# Altium PCB oldx_fc.PcbDoc (part 2 of 2)
Units mil, origin at the board's own origin, x right, y up, seen from the top; angles counter-clockwise.
Board outline 3255.08 x 2310.05 mil, 4 copper layers (Top Layer, Mid-Layer 1, Mid-Layer 2, Bottom Layer); 154 components, 132 nets, 622 pads, 230 vias.
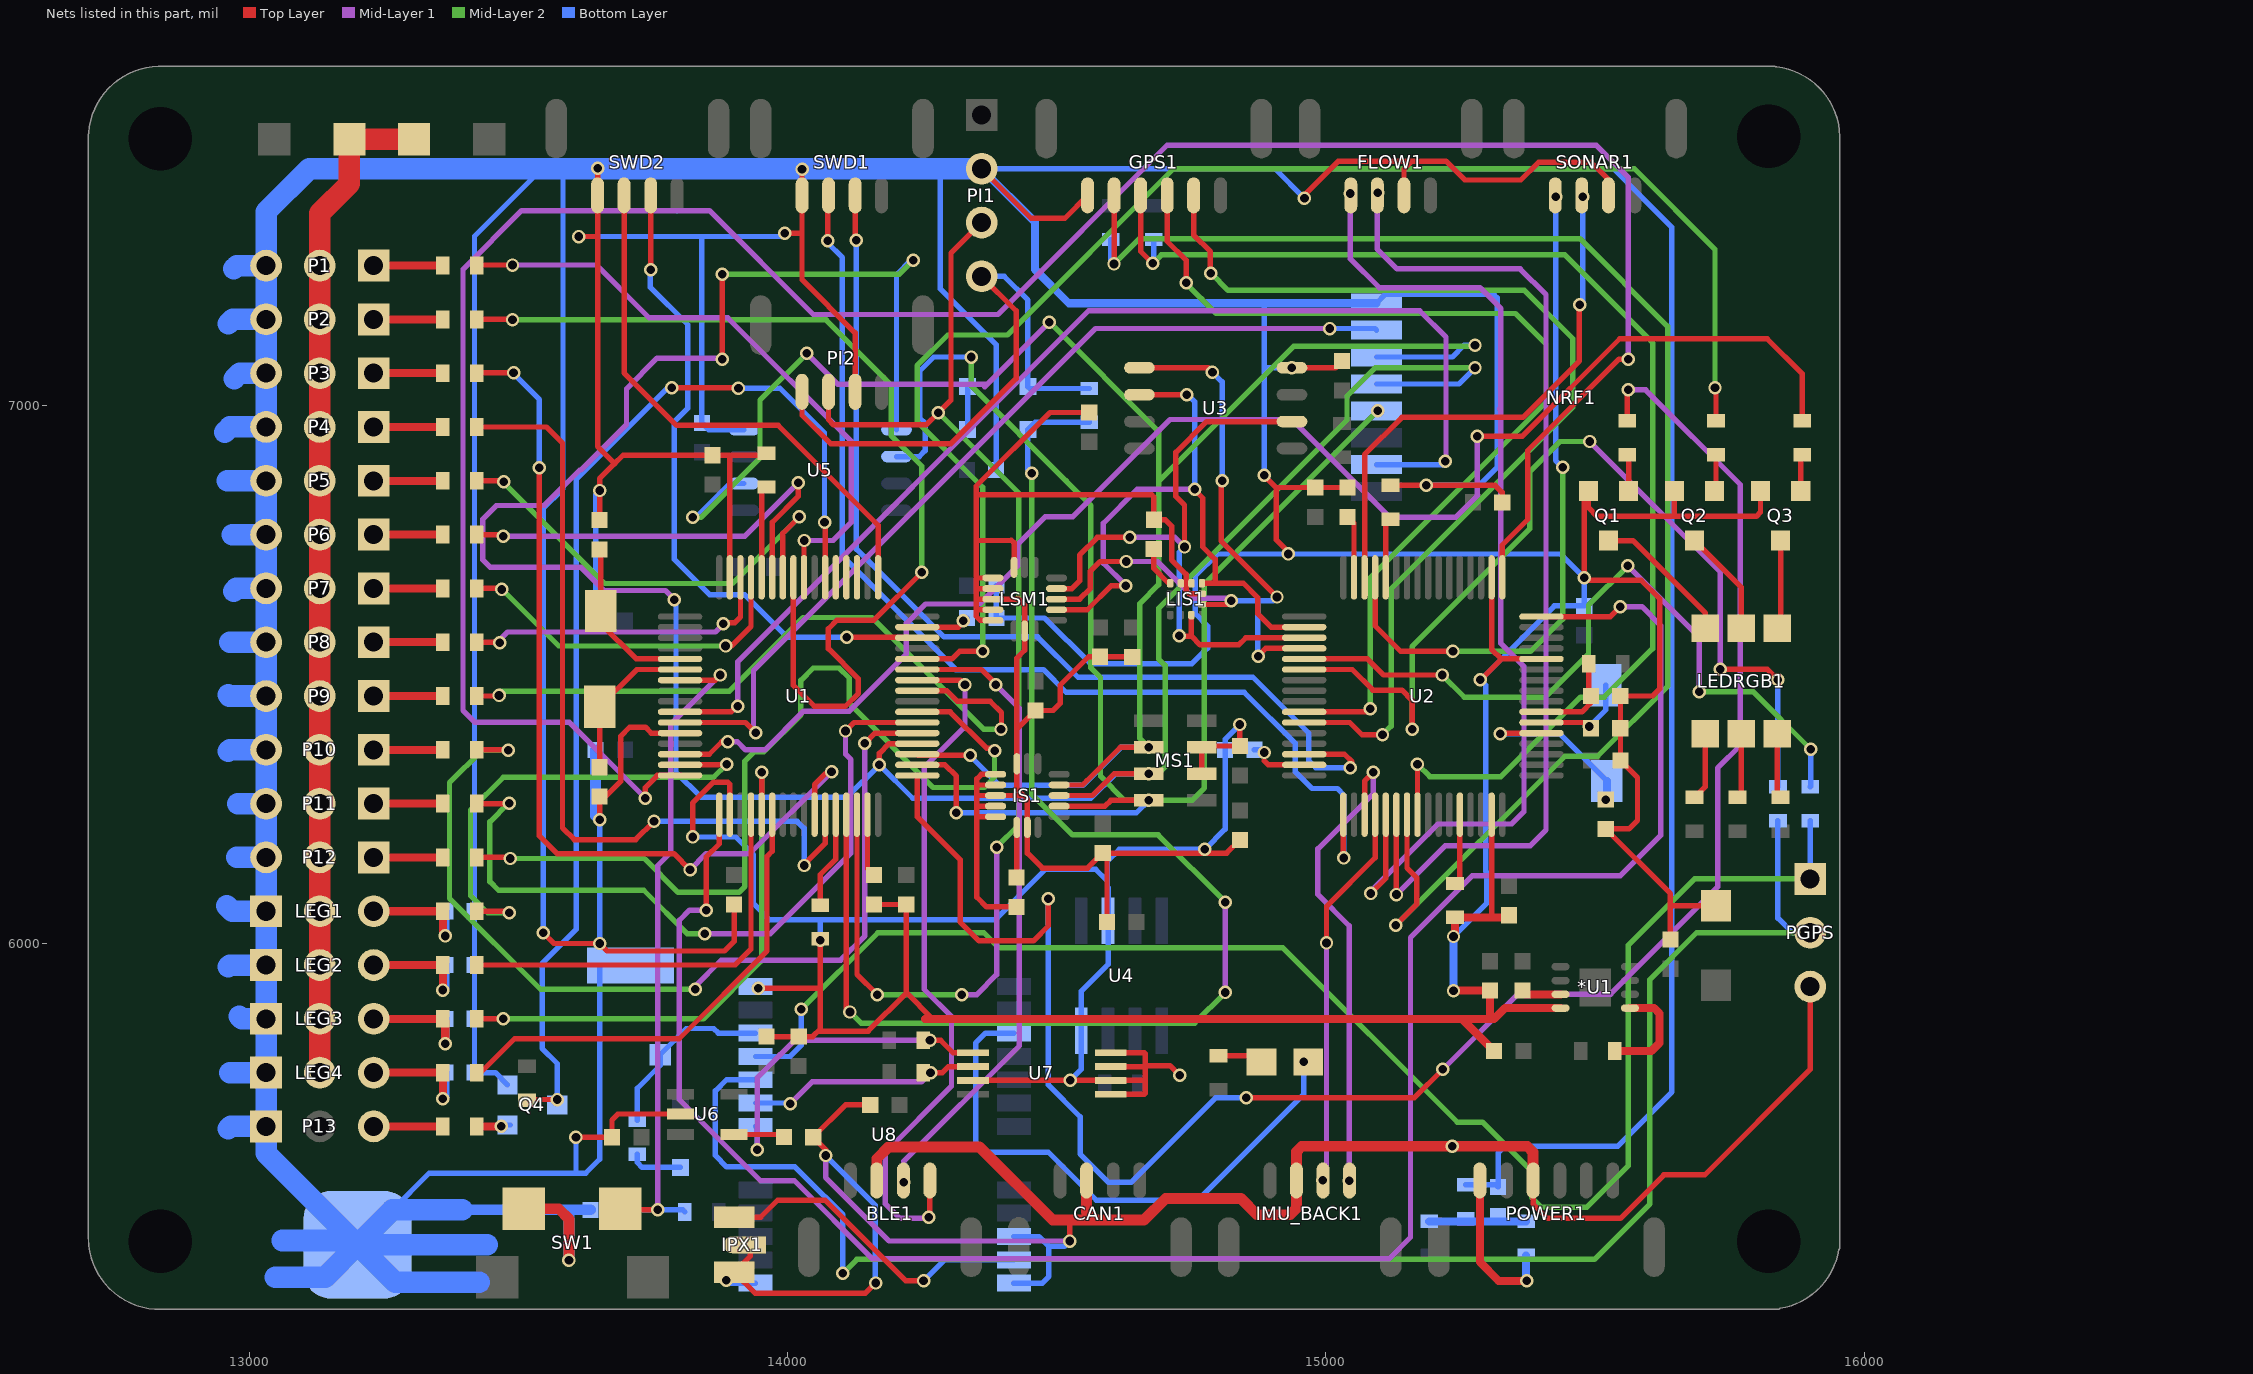
[diagram p4: the nets of this part, all layers, seen from the top]

## Via types
v1: diameter 25, hole 16, Top Layer to Bottom Layer, 221 vias
v2: diameter 50, hole 25, Top Layer to Bottom Layer, 7 vias
v3: diameter 50, hole 28, Top Layer to Bottom Layer, 2 vias

## Nets (pads, with @x,y where several pads share a name; then routed paths per layer and width w, separated by ;. In a path a pad name is that pad's centre, name@x,y a point inside that pad or via, vN(x,y) a via of type N, cw(c..) or ccw(c..) an arc to the next point about the centre after c; other vN are vias at no path point) (continued)
GND: *U1.8 BAT2.2 BLE1.3 C1.2 C2.2 C3.2 C4.2 C5.1 C6.1 C7.1 C8.1 C9.1 C10.1 C11.2 C12.2 C13.2 C15.2 C16.2 C17.2 C18.2 C19.1 C20.2 C21.2 C22.2 C23.2 C24.2 C25.2 C26.2 C27.2 C28.2 C29.2 C30.1 C31.1 C32.1 C33.1 C34.1 C35.2 C36.2 C37.1 C38.2 C39.2 C40.2 C41.2 C42.2 C43.1 C46.1 C47.1 C48.1 C49.1 C50.1 CAN1.3 D1.1 FLOW1.3 GPS1.1 IMU_BACK1.3 IPX1.1 IPX1.3 IS1.8 IS1.9 IS1.10 IS1.11 IS1.12 IS1.13 IS1.15 LEG1.1 LEG2.1 LEG3.1 LEG4.1 LIS1.2 LIS1.3 LIS1.12 LSM1.8 LSM1.9 LSM1.10 LSM1.11 LSM1.12 LSM1.13 LSM1.15 MS1.2 MS1.3 NRF1.8 P1.3 P2.3 P3.3 P4.3 P5.3 P6.3 P7.3 P8.3 P9.3 P10.3 P11.3 P12.3 P13.1 pad.0@13200,5440 PGPS.3 PI1.2 PI2.3 POWER1.4 Q1.1 Q2.1 Q3.1 Q4.1 R1.1 R2.1 R7.1 R8.1 R20.1 SONAR1.3 SW1.1 SWD1.1 SWD2.1 U1.12 U1.18 U1.63 U2.12 U2.18 U2.63 U3.4 U4.2 U4.8 U5.4 U6.2 U7.1 U7.2 U7.3 U7.4 U7.7 U8.10 U8.12 U8.13 U8.24 | length 39092.1
  Top Layer w10: v1(13545,6020) 13565,6000 v1(13650,6000) 13664,5986 13882,5986 13899.94,6003.94 C11.2@13899.94,6072.5 ; v1(13606,5640) C46.1@13673,5640 13673,5672 13684,5683 U6.2@13800,5683 ; v1(13611,7314) 13646.18,7314 ; v1(13646.18,7440.82) SWD2.1@13646.18,7390.43 13646.18,7314 ; v1(13650,6230) C7.1@13650,6273 13661,6273 13689,6301 13689,6385 13706,6402 13735,6402 13745.9,6391.1 U1.12@13799.53,6391.1 ; C8.1@13650,6787 v1(13650,6842) 13650,6864 13678,6892 ; v1(13823,6198) 13823,6261 13862,6300 13888,6300 13892.05,6295.95 U1.18@13892.05,6239.53 ; v1(13885,5373.82) IPX1.3@13900,5388.82 ; U1.63@13892.05,6680.47 13892.05,6904.05 ; IPX1.1@13930,5440 13930,5418.82 IPX1.3@13900,5388.82 ; v1(13945,5917) 14060,5917 ; R7.1@13956,6907.5 C22.2@13860.06,6907.5 13693.5,6907.5 13678,6892 ; C49.1@13960,5827 13979,5827 C48.1@14020,5827 14046,5827 14060,5841 14060,5917 ; v1(13994,7320) 14026.18,7320 ; v1(14026.18,7438.82) SWD1.1@14026.18,7390.43 14026.18,7320 ; 14060,5837 14149,5837 14219.94,5907.94 ; R1.1@14060,6008.5 v1(14060,6006) 14060,5917 ; v1(14070,5606) 14070,5617 C47.1@14047,5640 14107,5700 C50.1@14153,5700 ; PI2.3@14125,7025.43 14125,7135 14026.18,7233.82 14026.18,7320 ; C1.2@14159.94,6072.5 C26.2@14219.94,6072.5 14219.94,5908.56 14269,5859.5 ; v1(14163,5369) 14144,5350 13938.82,5350 IPX1.3@13900,5388.82 ; U7.7@14344.09,5745.59 U7.2@14600,5745.59 14659.59,5745.59 ; 14350.32,6620.31 LSM1.12@14380.94,6620.31 ; 14350.69,6659.69 LSM1.10@14380.94,6659.69 ; 14351.37,6235.63 IS1.13@14385.94,6235.63 ; 14352,6640 LSM1.11@14380.94,6640 14429,6640 14440,6629 LSM1.15@14440,6580.94 14440,6545 14425.32,6530.31 14425.32,6398.31 ; 14353,6275 IS1.11@14385.94,6275 14438,6275 ; 14353.69,6294.69 IS1.10@14385.94,6294.69 ; 14354.32,6255.31 IS1.12@14385.94,6255.31 ; 14354.37,6679.37 LSM1.9@14380.94,6679.37 ; PI1.2@14360,7440 14452,7348 14514.54,7348 GPS1.1@14556.97,7390.43 ; LSM1.13@14380.94,6600.63 14357.37,6600.63 14350,6608 14350,6749 ; IS1.9@14385.94,6314.37 14359.37,6314.37 14351,6306 14351,6086 14369,6068 C33.1@14425,6068 ; 14414,6749 14350,6749 ; 14415,6750 14420.31,6744.69 LSM1.8@14420.31,6699.06 ; v1(14524,5447) 14524,5486 ; C19.1@14560,6987 14487,6987 14350,6850 14350,6834 ; C31.1@14593,6040 C37.1@14593,6160 ; U7.1@14600,5720 14662,5720 14664,5722 14664,5773 ; U7.3@14600,5771.18 14662.18,5771.18 14664,5773 ; U7.4@14600,5796.77 14662.23,5796.77 14664,5795 14664,5773 ; C39.2@14639.94,6532.5 14639.44,6533 C34.1@14580,6533 14559,6533 14506,6480 14506,6446 14493,6433 C32.1@14460,6433 14425.32,6398.31 ; v1(14728,5755) 14710,5773 14664,5773 ; LIS1.3@14730.16,6669.53 14740,6669.53 ; LIS1.2@14749.84,6669.53 14740,6669.53 ; MS1.2@14769.21,6315.39 MS1.3@14769.21,6364.61 14771.61,6367 C30.1@14840,6367 v1(14840,6407) ; LIS1.12@14769.53,6649.84 14745.16,6649.84 14740,6655 14740,6669.53 ; C29.2@14839.94,6192.5 14815.44,6168 C37.1@14585,6168 14557,6140 14473,6140 14445,6168 IS1.15@14445,6215.94 14445,6268 14438,6275 ; v1(14885,6870) 14907.5,6847.5 ; v1@14930,6728 14907.5,6750.5 14907.5,6847.5 ; v1(14936.73,7070) 15017.56,7070 C16.2@15030.06,7082.5 ; v1@14960,7391 15023,7454 15160,7454 ; C3.2@15040.06,6847.5 C24.2@14980.06,6847.5 14907.5,6847.5 ; R2.1@15120,6851.5 v1(15186,6851.5) 15314.5,6851.5 15327.5,6838.5 C23.2@15327.5,6819.94 ; FLOW1.3@15145,7390.43 15145,7439 15160,7454 ; v1(15287,6490) 15325.9,6528.9 ; U2.63@15307.95,6239.53 15307.95,6049.55 15309,6048.5 ; U2.18@15307.95,6680.47 15307.95,6546.84 15325.9,6528.9 ; POWER1.4@15385,5559.57 15385,5516 15412,5489 15547,5489 15628,5570 15704,5570 15900,5766 PGPS.3@15900,5920 ; U2.12@15400.47,6528.9 15325.9,6528.9 ; Q1.1@15479.94,6833.6 v1(15479.94,6679.94) 15484.87,6675 15586,6675 15620,6641 15620,6473 15607,6460 C6.1@15547,6460 15547.5,6459.5 C25.2@15547.5,6339.94 15579,6308.44 15579,6229 15563,6213 C10.1@15520,6213 15640.06,6092.94 15640.06,6069 ; Q1.1@15487.6,6841.26 15487.6,6810.4 15504,6794 15643,6794 ; SONAR1.3@15525,7390.43 15525,7420 15493,7452 15395,7452 15362,7419 15258,7419 15223,7454 15160,7454 ; C13.2@15640.06,6007.5 15640.06,6069 ; Q2.1@15647.6,6841.26 15647.6,6798.6 15643,6794 ; D1.1@15725,6070 15641.06,6070 15640.06,6069 ; Q3.1@15807.6,6841.26 15807.6,6801.6 15800,6794 15643,6794 ; 13646.18,7314 13646.18,6923.82 13678,6892 ; 14350,6749 14350,6834 ; 14350,6834 14676,6834 14680.06,6829.94 C38.2@14680.06,6787.5 14701.5,6787.5 14713,6776 14713,6713 14740,6686 14740,6669.53 ; 14425.32,6398.31 IS1.8@14425.32,6334.06 14425.32,6287.69 14438,6275
  Top Layer w15: 14254.5,5859.5 14269,5859.5 15253.06,5859.5 ; v1(15237,5912.5) C15.2@15304.94,5912.5 15304.94,5859.5 ; v1(15237,6013) 15238,6013 15240,6015 R8.1@15240,6048.5 15309,6048.5 C27.2@15335.94,6048.5 ; C12.2@15312.5,5800.06 15253.06,5859.5 ; *U1.8@15436,5880.02 15333.02,5880.02 15312.5,5859.5 15304.94,5859.5 ; 15253.06,5859.5 15304.94,5859.5
  Top Layer w20: SW1.1@13509,5507 13574,5507 13593,5488 v1(13593,5411) ; BLE1.3@14165,5559.57 14165,5600 14187,5622 14356,5622 14492,5486 14524,5486 14570,5486 ; CAN1.3@14555,5559.57 14555,5501 14570,5486 ; POWER1.4@15385,5559.57 15385,5612 15374,5623 v1(15235,5623) 14955,5623 14945,5613 IMU_BACK1.3@14945,5559.57 14945,5508 14933,5496 14872,5496 14842,5526 14702,5526 14662,5486 14570,5486
  Mid-Layer 1 w10: v1(14070,5606) 14070,5566 14070,5565 14188,5447 v1(14524,5447)
  Bottom Layer w10: pad.0@13265,5505 13333,5573 13624,5573 13650,5599 BAT2.2@13650,5958.74 ; Q4.1@13478.74,5737.4 13456.08,5760.06 C41.2@13417.5,5760.06 C40.2@13417.5,5860.06 C36.2@13417.5,5960.06 C35.2@13417.5,6060.06 13417.5,7314.5 13543,7440 ; v1(13545,6020) 13545,6808 13582,6845 13582,7430 ; 13606,5575 v1(13606,5640) ; v1(13611,7314) 13839,7314 ; C21.2@13642.5,6599.94 13642.5,6834.5 v1(13650,6842) ; v1(13650,6000) v1(13650,6230) ; v1(13823,6198) 13903,6198 13936,6165 13936,6074 13966,6044 14385,6044 14479,6138 14572,6138 14594,6116 ; v1(13885,5373.82) 13890,5368.82 U8.13@13939.68,5368.82 ; U5.4@13918.27,6955 13852.44,6955 C42.2@13839.94,6967.5 13839.94,7313.06 13839,7314 ; U8.24@13939.68,5920 13942,5920 v1(13945,5917) ; v1@13988,7314 13839,7314 ; v1(14060,6006) 14060,6040 ; v1(14070,5606) 14162,5514 14162,5370 v1(14163,5369) ; 14290,7440 14283,7433 14283,7217 14387,7113 C43.1@14387,6880 ; PI1.2@14360,7440 14905,7440 ; C17.2@14387.5,6665.06 C2.2@14387.5,6605.06 14476.94,6605.06 14562,6520 14751,6520 14780,6549 14780,6590 14757,6613 14757,6683 14798,6724 v1(14930,6724) 15435.87,6724 v1(15479.94,6679.94) C18.2@15479.94,6627.5 15424.5,6627.5 v1(15287,6490) 15297,6480 15297,6134 15299,6132 15299,6075 v1(15237,6013) ; U8.12@14420,5368.82 14472.82,5368.82 14485,5381 14485,5437 ; U8.10@14420,5455.43 14466.57,5455.43 14485,5437 ; v1(14524,5447) 14514,5437 14485,5437 ; v1(14525,5746) 14545,5766 U4.8@14545,5837.64 14545,5911 14595,5961 U4.2@14595,6042.36 14595,6104 14594,6105 14594,6116 ; v1(14840,6407) 14812.5,6379.5 C4.2@14812.5,6359.94 14812.5,6212.5 v1(14775,6175) 14616,6175 14594,6153 14594,6116 ; v1(14885,6870) 14885,7183 ; 14887,7070 v1(14936.73,7070) ; v1(14960,7385) 14905,7440 ; NRF1.8@15094,7190 15111,7207 15311,7207 15318,7200 15318,6885 15284.5,6851.5 v1(15186,6851.5) ; v1(15235,5623) 15332,5623 ; R20.1@15260,5551.5 15315.94,5551.5 C28.2@15319.94,5547.5 15319.94,5610.94 15332,5623 ; 14905,7440 15534,7440 15643,7331 15643,5724 15542,5623 15332,5623
  Bottom Layer w15: PI1.2@14360,7440 14459,7341 14459,7253 14522,7190 NRF1.8@15094,7190 ; v1(15237,5912.5) v1(15237,6013)
  Bottom Layer w20: 13395,5505 C5.1@13633,5505 ; v1(13593,5411) 13593,5501 ; v1@13642.5,6237.5 C20.2@13642.5,6359.94
  Bottom Layer w40: 12953,6950 12963,6960 P4.3@13030,6960 ; 12957,6070 12967,6060 LEG1.1@13030,6060 ; 12958,6860 P5.3@13030,6860 ; 12960,5656 12964,5660 P13.1@13030,5660 ; 12960,5957 12963,5960 LEG2.1@13030,5960 ; 12960,6357 12963,6360 P10.3@13030,6360 ; 12960,6462 12962,6460 P9.3@13030,6460 ; 12960,7152 12968,7160 P2.3@13030,7160 ; 12963,5760 LEG4.1@13030,5760 ; 12963,6560 P8.3@13030,6560 ; 12967,6760 P6.3@13030,6760 ; 12970,6655 12975,6660 P7.3@13030,6660 ; 12970,7254 12976,7260 P1.3@13030,7260 ; 12971,7050 12981,7060 P3.3@13030,7060 ; 12976,6160 P12.3@13030,6160 ; 12977,6260 P11.3@13030,6260 ; 12980,5865 12985,5860 LEG3.1@13030,5860 ; 13047,5380 13140,5380 pad.0@13200,5440 ; 13060,5448 pad.0@13192,5448 ; 13395,5505 13265,5505 pad.0@13200,5440 ; 13426,5370 13270,5370 pad.0@13200,5440 ; 13441,5440 pad.0@13200,5440 ; PI1.2@14360,7440 14290,7440 13543,7440 13110,7440 13030,7360 P1.3@13030,7260 ; P13.1@13030,5660 13030,5610 pad.0@13192,5448 ; P13.1@13030,5660 LEG4.1@13030,5760 ; LEG4.1@13030,5760 LEG3.1@13030,5860 ; LEG3.1@13030,5860 LEG2.1@13030,5960 ; LEG2.1@13030,5960 LEG1.1@13030,6060 ; LEG1.1@13030,6060 P12.3@13030,6160 ; P12.3@13030,6160 P11.3@13030,6260 ; P11.3@13030,6260 P10.3@13030,6360 ; P10.3@13030,6360 P9.3@13030,6460 ; P9.3@13030,6460 P8.3@13030,6560 ; P8.3@13030,6560 P7.3@13030,6660 ; P7.3@13030,6660 P6.3@13030,6760 ; P6.3@13030,6760 P5.3@13030,6860 ; P5.3@13030,6860 P4.3@13030,6960 ; P4.3@13030,6960 P3.3@13030,7060 ; P3.3@13030,7060 P2.3@13030,7160 ; P2.3@13030,7160 P1.3@13030,7260 ; pad.0@13192,5448 pad.0@13200,5440
GROUND1: R32.2 U1.15 | length 902.7
  Top Layer w10: R32.2@13421.5,6060 13479,6060 v1(13482,6057) ; U1.15@13799.53,6332.05 v1@13885.05,6332.05
  Mid-Layer 2 w10: v1(13482,6057) 13442,6057 13410,6089 13410,6248 13471,6309 13862,6309 v1(13886,6333)
GROUND2: R33.2 U1.20 | length 772.2
  Top Layer w10: R33.2@13421.5,5960 13902,5960 13931.42,5989.42 U1.20@13931.42,6239.53
GROUND3: R36.2 U1.21 | length 1153.9
  Top Layer w10: R36.2@13421.5,5860 v1(13471,5860) ; U1.21@13951.1,6239.53 v1@13951.1,6306.1
  Mid-Layer 2 w10: v1(13471,5860) 13843,5860 13951.1,5968.1 13951.1,6212 ; 13951.1,6037.1 13951.1,6212 ; v1@13951.1,6306.1 13951.1,6212
  other v1: 13951,6318
GROUND4: R37.2 U1.22 | length 890.7
  Top Layer w10: R37.2@13421.5,5760 13429,5760 13492,5823 13798,5823 13961,5986 13961,6162 13970.79,6171.79 U1.22@13970.79,6239.53
IIC_SCLG: R49.1 U7.6 U8.19 | length 460.7
  Top Layer w10: v1(14265,5760) R49.1@14251.5,5760 14287,5760 14298.18,5771.18 U7.6@14344.09,5771.18
  Mid-Layer 1 w10: v1(14004,5702) 14045,5743 14248,5743 v1(14265,5760)
  Bottom Layer w10: U8.19@13939.68,5703.46 14002.54,5703.46 v1(14004,5702)
IIC_SDAG: R48.1 U7.5 U8.18 | length 642.8
  Top Layer w10: v1(14264,5820) R48.1@14251.5,5820 14284,5820 14307.23,5796.77 U7.5@14344.09,5796.77
  Mid-Layer 1 w10: v1(13943,5617) 13943,5751 13985,5793 14012,5820 v1(14264,5820)
  Bottom Layer w10: U8.18@13939.68,5660.16 13943,5656.84 v1(13943,5617)
LED_11: R24.1 U1.14 | length 2793.8
  Top Layer w10: U1.14@13799.53,6351.73 13853.73,6351.73 v1@13877,6375 ; v1(15281,6943) 15365,6943 15546,7124 15820,7124 15885,7059 R24.1@15885,6971.5
  Mid-Layer 1 w10: v1(13888,6375) 13906,6375 13921,6360 13957,6360 14029,6432 14114,6432 14220,6538 14220,6595 14256,6631 14356,6631 14427,6702 14427,6742 14478,6793 14529,6793 14710,6974 14937,6974 15119,6792 15241,6792 15281,6832 v1(15281,6943)
LED_12: R23.1 U1.44 | length 2722.1
  Top Layer w10: U1.44@14240.47,6528.9 14304.9,6528.9 14319,6543 v1(14362,6543) ; R23.1@15725,6971.5 v1@15725,7031
  Mid-Layer 2 w10: v1(14362,6543) 14362,6848 14240,6970 14240,7074 14297,7131 14408,7131 14717,7440 15573,7440 15723,7290 v1(15723,7033)
LED_13: R22.1 U1.33 | length 3580
  Top Layer w10: U1.33@14240.47,6312.36 14240.47,6235.53 14320,6156 14320,6040 14355,6005 14456,6005 14484,6033 v1(14484,6083) ; v1(14852,5713) 15164,5713 v1(15217,5766) ; R22.1@15560,6971.5 v1@15560,7027
  Mid-Layer 1 w10: v1(15217,5766) 15357,5906 15529,5906 15728,6105 15728,6326 15770,6368 15770,6853 15594,7029 v1(15562,7029)
  Bottom Layer w10: v1(14484,6083) 14484,5737 14543,5678 14543,5609 14596,5556 14638,5556 14795,5713 v1(14852,5713)
Net*U1_1: *U1.1 R10.2 | length 203.9
  Top Layer w15: R10.2@15536.5,5800 15605,5800 15620,5815 15620,5870 15610,5880 *U1.1@15565,5880
Net*U1_7: *U1.7 C14.2 | length 73.9
  Top Layer w15: C14.2@15364.94,5912.5 15371.84,5905.59 *U1.7@15436,5905.59
NetBAT2_1: BAT2.1 R47.1 U8.22 | length 340.3
  Bottom Layer w10: R47.1@13720,5671.5 13720,5731 13762.68,5773.68 BAT2.1@13762.68,5793.39 13811.29,5842 13862,5842 13870.61,5833.39 U8.22@13939.68,5833.39
NetC1_1: C1.1 U1.31 | length 117.5
  Top Layer w10: U1.31@14147.95,6239.53 14147.95,6139.05 C1.1@14160,6127
NetC2_1: C2.1 U1.47 | length 98.3
  Top Layer w10: U1.47@14240.47,6587.95 14316.95,6587.95 v1@14326,6597
  Bottom Layer w10: v1(14326,6600) 14331,6605 C2.1@14333,6605
NetC3_1: C3.1 U2.31 | length 117.5
  Top Layer w10: C3.1@15040,6793 15052.05,6780.95 U2.31@15052.05,6680.47
NetC4_1: C4.1 U2.47 | length 97.9
  Top Layer w10: 14885,6340 14892.95,6332.05 U2.47@14959.53,6332.05
  Bottom Layer w10: C4.1@14867,6360 14880,6360 v1(14885,6355)
NetC6_2: C6.2 R6.1 U2.7 | length 173.2
  Top Layer w10: U2.7@15400.47,6430.47 15475.47,6430.47 15492.5,6447.5 C6.2@15492.5,6460.06 15488.5,6464.06 R6.1@15488.5,6520
NetC7_2: C7.2 U1.6 X1.1 | length 290.7
  Top Layer w10: C7.2@13650.06,6327.5 13650.06,6439.94 X1.1@13650,6440 13719.21,6509.21 U1.6@13799.53,6509.21
NetC8_2: C8.2 U1.5 X1.2 | length 313.3
  Top Layer w10: C8.2@13649.94,6732.5 13652,6730.44 X1.2@13652,6618 13652,6595 13718.1,6528.9 U1.5@13799.53,6528.9
NetC9_2: C9.2 U2.6 X2.1 | length 195.2
  Top Layer w10: U2.6@15400.47,6410.79 15481.78,6410.79 C9.2@15492.5,6400.06
  Bottom Layer w10: v1(15489.28,6403.28) 15486,6400 15520,6434 X2.1@15520,6480
NetC10_2: C10.2 U2.5 X2.2 | length 346.7
  Top Layer w10: v1(15324,6390) 15325.1,6391.1 U2.5@15400.47,6391.1
  Bottom Layer w10: v1(15324,6390) 15434,6390 X2.2@15522,6302
  Bottom Layer w15: v1(15520.06,6267.5) 15522,6269.44 X2.2@15522,6302
NetC28_1: C28.1 R17.1 R19.2 R20.2 | length 180
  Bottom Layer w15: R19.2@15192,5483.5 15252,5483.5 R17.1@15372,5483.5
NetC33_2: C33.2 IS1.14 | length 93.5
  Top Layer w10: C33.2@14425.06,6122.5 14425.06,6215.69 IS1.14@14425.32,6215.94
NetC35_1: C35.1 LEG1.3 R32.1 | length 222.4
  Top Layer w15: LEG1.3@13230,6060 R32.1@13358.5,6060 13358.5,6018.5 v1(13363,6014)
  Bottom Layer w15: v1(13363,6014) C35.1@13363,6060
NetC36_1: C36.1 LEG2.3 R33.1 | length 217
  Top Layer w15: LEG2.3@13230,5960 R33.1@13358.5,5960 v1(13358.5,5913.5)
  Bottom Layer w15: v1@13363,5918 C36.1@13363,5960
NetC38_1: C38.1 LIS1.4 | length 77.9
  Top Layer w10: C38.1@14680,6733 14680,6697 14707.47,6669.53 LIS1.4@14710.47,6669.53
NetC40_1: C40.1 LEG3.3 R36.1 | length 222.4
  Top Layer w15: LEG3.3@13230,5860 R36.1@13358.5,5860 13363,5855.5 v1(13363,5814)
  Bottom Layer w15: v1(13363,5814) C40.1@13363,5860
NetC41_1: C41.1 LEG4.3 R37.1 | length 221
  Top Layer w15: LEG4.3@13230,5760 R37.1@13358.5,5760 v1(13358.5,5711.5)
  Bottom Layer w15: v1@13363,5716 C41.1@13363,5760
NetC47_2: C47.2 U6.4 | length 94.5
  Top Layer w10: U6.4@13900,5645 13987.56,5645 C47.2@13992.5,5640.06
NetD2_2: D2.2 D3.1 | length 80
  Bottom Layer w10: D2.2@14334,6955 D3.1@14334,7035
NetD3_2: D3.2 PI1.4 PI2.1 R41.1 | length 1105.7
  Top Layer w10: PI2.1@14026.18,7025.43 14026.18,6981.82 14079,6929 14303,6929 14424,7050 14424,7176 PI1.4@14360,7240
  Bottom Layer w10: PI1.4@14360,7240 14402,7240 14446,7196 D3.2@14446,7035 ; D3.2@14449.5,7031.5 R41.1@14560,7031.5
NetD7_2: D7.2 R47.2 | length 99.2
  Bottom Layer w10: R47.2@13720,5608.5 13720,5593 13729,5584 D7.2@13800,5584
NetIPX1_2: IPX1.2 U8.11 | length 611.5
  Top Layer w10: IPX1.2@13900,5491.18 13949.18,5491.18 13981,5523 14069,5523 14219,5373 v1(14252,5373)
  Bottom Layer w10: v1(14252,5373) 14291.13,5412.13 U8.11@14420,5412.13
NetLEDRGB1_1: LEDRGB1.1 R15.2 | length 126.8
  Top Layer w10: R15.2@15685,6271.5 15705,6291.5 LEDRGB1.1@15705,6390
NetLEDRGB1_2: LEDRGB1.2 R14.2 | length 121.4
  Top Layer w10: R14.2@15765,6271.5 15771.93,6278.43 LEDRGB1.2@15771.93,6390
NetLEDRGB1_3: LEDRGB1.3 R13.2 | length 121
  Top Layer w10: LEDRGB1.3@15838.86,6390 15838.86,6277.64 R13.2@15845,6271.5
NetLEDRGB1_4: LEDRGB1.4 Q3.3 | length 165.6
  Top Layer w10: LEDRGB1.4@15838.86,6585.67 15845,6591.81 Q3.3@15845,6748.74
NetLEDRGB1_5: LEDRGB1.5 Q2.3 | length 199.1
  Top Layer w10: Q2.3@15685,6748.74 15771.93,6661.81 LEDRGB1.5@15771.93,6585.67
NetLEDRGB1_6: LEDRGB1.6 Q1.3 | length 264.1
  Top Layer w10: Q1.3@15525,6748.74 15570.26,6748.74 15705,6614 LEDRGB1.6@15705,6585.67
NetP1_1: P1.1 R11.2 | length 128.5
  Top Layer w15: P1.1@13230,7260 R11.2@13358.5,7260
NetP2_1: P2.1 R12.2 | length 128.5
  Top Layer w15: P2.1@13230,7160 R12.2@13358.5,7160
NetP3_1: P3.1 R16.2 | length 128.5
  Top Layer w15: P3.1@13230,7060 R16.2@13358.5,7060
NetP4_1: P4.1 R18.2 | length 128.5
  Top Layer w15: P4.1@13230,6960 R18.2@13358.5,6960
NetP5_1: P5.1 R21.2 | length 128.5
  Top Layer w15: P5.1@13230,6860 R21.2@13358.5,6860
NetP6_1: P6.1 R25.2 | length 128.5
  Top Layer w15: P6.1@13230,6760 R25.2@13358.5,6760
NetP7_1: P7.1 R26.2 | length 128.5
  Top Layer w15: P7.1@13230,6660 R26.2@13358.5,6660
NetP8_1: P8.1 R27.2 | length 128.5
  Top Layer w15: P8.1@13230,6560 R27.2@13358.5,6560
NetP9_1: P9.1 R28.2 | length 128.5
  Top Layer w15: P9.1@13230,6460 R28.2@13358.5,6460
NetP10_1: P10.1 R30.2 | length 128.5
  Top Layer w15: P10.1@13230,6360 R30.2@13358.5,6360
NetP11_1: P11.1 R31.2 | length 128.5
  Top Layer w15: P11.1@13230,6260 R31.2@13358.5,6260
NetP12_1: P12.1 R34.2 | length 128.5
  Top Layer w15: P12.1@13230,6160 R34.2@13358.5,6160
NetP13_3: P13.3 R40.2 | length 128.5
  Top Layer w15: P13.3@13230,5660 R40.2@13358.5,5660
NetPGPS_1: PGPS.1 R45.1 U8.21 | length 2936.1
  Mid-Layer 2 w10: v1(14025,5878) 14167,6020 14364,6020 14392,5992 14920,5992 15244,5668 15291,5668 15382,5577 15382,5528 15400,5510 15485,5510 15562,5587 15562,5997 15685,6120 PGPS.1@15900,6120
  Bottom Layer w10: U8.21@13939.68,5790.08 14004.08,5790.08 14025,5811 v1(14025,5878) ; PGPS.1@15900,6120 R45.1@15900,6228.5
NetPGPS_2: PGPS.2 R46.1 U8.20 | length 3163.3
  Mid-Layer 2 w10: v1(14102,5387) 14128,5413 15499,5413 15602,5516 15602,5933 15689,6020 PGPS.2@15900,6020
  Bottom Layer w10: U8.20@13939.68,5746.77 13885.77,5746.77 13865,5726 13865,5606 13886,5585 14013,5585 14033,5565 ; 14041,5557 14033,5565 ; v1(14102,5387) 14102,5496 14033,5565 ; R46.1@15840,6228.5 15840,6047 15867,6020 PGPS.2@15900,6020
NetPPS1_1: PPS1.1 R44.2 | length 88.5
  Top Layer w10: R44.2@14800,5791.5 PPS1.1@14888.47,5791.5
NetQ1_2: Q1.2 R22.2 | length 68.2
  Top Layer w10: R22.2@15560,6908.5 15562.4,6906.1 Q1.2@15562.4,6841.26
NetQ2_2: Q2.2 R23.2 | length 68.3
  Top Layer w10: Q2.2@15722.4,6841.26 15725,6843.86 R23.2@15725,6908.5
NetQ3_2: Q3.2 R24.2 | length 68.3
  Top Layer w10: Q3.2@15882.4,6841.26 15882.4,6905.9 R24.2@15885,6908.5
NetQ4_2: Q4.2 R40.1 | length 50.4
  Top Layer w15: R40.1@13421.5,5660 v1(13467,5660)
  Bottom Layer w10: Q4.2@13478.74,5662.6 Q4.2@13483.6,5662.6
NetR1_2: R1.2 U1.28 | length 180
  Top Layer w10: R1.2@14060,6071.5 14060,6128 14088.9,6156.9 U1.28@14088.9,6239.53
NetR2_2: R2.2 U2.28 | length 111.7
  Top Layer w10: U2.28@15111.1,6680.47 15111.1,6779.6 R2.2@15120,6788.5
NetR7_2: R7.2 U1.60 | length 171.7
  Top Layer w10: U1.60@13951.1,6680.47 13951.1,6839.6 R7.2@13960,6848.5
NetR8_2: R8.2 U2.60 | length 131.7
  Top Layer w10: R8.2@15240,6111.5 15248.9,6120.4 U2.60@15248.9,6239.53
NRF_CE: NRF1.2 U1.10 | length 2160.7
  Top Layer w10: U1.10@13799.53,6430.47 13894.47,6430.47 v1@13905,6441
  Mid-Layer 1 w10: v1(13907,6441) 13907,6524 14559,7176 15174,7176 15223,7127 15223,7004 v1@15223,6896
  Bottom Layer w10: NRF1.2@15094,6890 15216,6890 v1(15222,6896)
NRF_IRQ: NRF1.7 U1.11 | length 1687.6
  Top Layer w10: U1.11@13799.53,6410.79 13921.21,6410.79 v1(13940,6392)
  Mid-Layer 1 w10: v1(13940,6392) 13936,6396 13936,6507 14572,7143 v1(15007,7143)
  Bottom Layer w10: v1(15007,7143) 15091,7143 NRF1.7@15094,7140
P_LEG: LEG1.2 LEG2.2 LEG3.2 LEG4.2 P1.2 P2.2 P3.2 P4.2 P5.2 P6.2 P7.2 P8.2 P9.2 P10.2 P11.2 P12.2 R38.2 R39.2 | length 1877.8
  Top Layer w40: LEG4.2@13130,5760 LEG3.2@13130,5860 LEG2.2@13130,5960 LEG1.2@13130,6060 P12.2@13130,6160 P11.2@13130,6260 P10.2@13130,6360 P9.2@13130,6460 P8.2@13130,6560 P7.2@13130,6660 P6.2@13130,6760 P5.2@13130,6860 P4.2@13130,6960 P3.2@13130,7060 P2.2@13130,7160 13130,7238 P1.2@13130,7260 13130,7357 13185,7412 R39.2@13185,7495 13241,7495 R38.2@13305,7495
POWER: POWER1.6 R17.2 | length 301
  Top Layer w15: POWER1.6@15286,5559.57 15286,5408 15321,5373 v1(15373,5373)
  Bottom Layer w15: R17.2@15372,5420.5 15372,5374 v1(15373,5373)
PPS: PPS1.2 U8.3 | length 1059
  Bottom Layer w10: U8.3@14420,5833.39 14367.39,5833.39 14349,5815 14349,5631 14368,5612 14484,5612 14573,5523 14762,5523 14959,5720 v1(14959,5780)
PWM1: R11.1 U1.56 | length 1153
  Top Layer w10: R11.1@13422.5,7261 v1(13488,7261) ; U1.56@14029.84,6680.47 14029.84,6748.84 v1(14030,6749)
  Mid-Layer 1 w10: v1(13488,7261) 13644,7261 13742,7163 13888,7163 14117.43,6933.57 14117.43,6782.43 14084,6749 v1(14030,6749)
  Mid-Layer 2 w10: v1@13487,7260 v1(13488,7261)
PWM2: R12.1 U1.57 | length 1899.4
  Top Layer w10: R12.1@13421.5,7160 v1@13487,7160 ; U1.57@14010.16,6680.47 14010.16,6479.84 14049,6441 14107,6441 14131,6465 14131,6492 14075,6548 14075,6585 14091,6601 14160,6601 v1(14249,6690)
  Mid-Layer 2 w10: v1(13488,7159) 14071,7159 14191.86,7038.14 14191.86,6944.14 14249,6887 v1(14249,6690)
PWM3: R16.1 U1.26 | length 1705.2
  Top Layer w10: R16.1@13421.5,7060 13422.5,7061 v1(13490,7061) ; v1(13538,6884) 13538,6200 13571,6167 13788,6167 v1(13818,6137) ; U1.26@14049.53,6239.53 14049.53,6295.53 v1@14070,6316
  Mid-Layer 1 w10: v1(13818,6137) 13848,6167 13880,6167 ; 13854,6167 13880,6167 ; v1(14081,6319) 13929,6167 13880,6167
  Bottom Layer w10: v1(13490,7061) 13490,7059 13538,7011 v1(13538,6884)
PWM4: R18.1 U1.27 | length 1545.1
  Top Layer w10: R18.1@13421.5,6960 13551,6960 13581,6930 13581,6270 13581,6215 13603,6193 13717,6193 v1(13751,6227) ; v1(14030,6145) 14029,6146 14069.21,6186.21 U1.27@14069.21,6239.53
  Bottom Layer w10: v1(13751,6227) 13796,6227 14017,6227 14030,6214 v1(14030,6145)
PWM5: R21.1 U1.58 | length 852.9
  Top Layer w10: R21.1@13421.5,6860 v1@13470,6860 ; U1.58@13990.47,6680.47 13990.47,6762.47 v1(14021,6793)
  Mid-Layer 2 w10: v1@13471,6857 13659,6669 13897,6669 v1(14021,6793)
  other v1: 13472,6858
PWM6: R25.1 U1.59 | length 831
  Top Layer w10: R25.1@13421.5,6760 v1@13468,6760 ; U1.59@13970.79,6680.47 13970.79,6782.79 14019,6831 v1(14019,6856)
  Mid-Layer 1 w10: v1(13471,6757) 13920,6757 v1(14019,6856)
PWM7: R26.1 U1.61 | length 660.4
  Top Layer w10: R26.1@13421.5,6660 13466,6660 v1(13468,6658) ; v1(13884,6553) 13895,6553 13931.42,6589.42 U1.61@13931.42,6680.47
  Mid-Layer 2 w10: v1(13468,6658) 13469,6658 13574,6553 v1(13884,6553)
PWM8: R27.1 U1.62 | length 588.7
  Top Layer w10: R27.1@13421.5,6560 13463,6560 v1(13464,6559) ; v1(13880,6594) 13882,6596 13901,6596 13911.73,6606.73 U1.62@13911.73,6680.47
  Mid-Layer 1 w10: v1(13464,6559) 13462,6561 13462,6562 13479,6579 13865,6579 v1(13880,6594)
PWM9: R28.1 U1.41 | length 1348
  Top Layer w10: R28.1@13421.5,6460 13462,6460 v1(13463,6461) ; U1.41@14240.47,6469.84 14295.16,6469.84 14315,6450 14376,6450 14397,6429 14397,6393 14396,6394 v1(14396,6398)
  Mid-Layer 2 w10: v1(13463,6461) 13457,6461 13465,6469 13891,6469 14028,6606 14156,6606 14364,6398 v1(14396,6398)
PWM10: R30.1 U1.37 | length 1756.3
  Top Layer w10: R30.1@13421.5,6360 v1@13479,6360 ; v1(14143,6372) 14162.1,6391.1 U1.37@14240.47,6391.1
  Mid-Layer 1 w10: v1(13828,5915) 13828,5921 13876,5969 14098,5969 14143,6014 v1(14143,6372)
  Mid-Layer 2 w10: v1(13480,6359) 13431,6359 13371,6299 13371,6084 13540,5915 v1(13828,5915)
PWM11: R31.1 U1.38 | length 1364.5
  Top Layer w10: R31.1@13421.5,6260 v1@13481,6260 ; v1(14107,6395) 14122.79,6410.79 U1.38@14240.47,6410.79
  Mid-Layer 1 w10: v1(13845,6018) 13967,6018 14117,6168 14117,6342 14107,6352 v1(14107,6395)
  Mid-Layer 2 w10: v1@13481,6261 13446,6226 13446,6115 13462,6099 13732,6099 13813,6018 v1(13845,6018)
  other v1: 13482,6261
PWM12: R34.1 U1.39 | length 1693.2
  Top Layer w10: R34.1@13421.5,6160 13482,6160 v1(13484,6158) ; U1.39@14240.47,6430.47 14301.53,6430.47 14369,6363 14387,6363 14387,6361 v1(14384,6358)
  Mid-Layer 2 w10: v1(13484,6158) 13733,6158 13796,6095 13909,6095 13920,6106 13920,6339 13937.51,6356.51 13955.51,6356.51 14024,6425 14024,6489 14047,6512 14095,6512 14114,6493 14114,6446 14270,6290 14365,6290 14384,6309 v1(14384,6358)
RST_FC: C5.2 R5.1 SW1.2 U1.7 | length 1300.4
  Top Layer w10: SW1.2@13688,5507 13689.94,5505.06 v1(13758,5505.06) ; U1.7@13799.53,6489.53 13864.53,6489.53
  Mid-Layer 1 w10: v1(13758,5505.06) 13758,6145 13782,6169 13782,6407 v1(13874,6499)
  Bottom Layer w10: C5.2@13687.5,5505.06 v1(13758,5505.06) 13804.5,5505.06 R5.1@13808.5,5501.06
SBUS: Q4.3 R35.1 U1.54 | length 2074.9
  Top Layer w10: R35.1@13516.5,5710 v1(13571,5710) ; v1(13784,7033) 13907,7033 v1(13908,7032) ; v1(14068,6783) 14069.21,6781.79 U1.54@14069.21,6680.47
  Bottom Layer w10: v1@13571.26,5720 13571.26,5776.74 13543,5805 13543,5962.74 13606.26,6026 13606.26,6862.26 13781,7037 13781,7036 v1(13784,7033) ; v1(13908,7032) 13985,7032 14068,6949 v1(14068,6783)
SCL_B: GPS1.3 R4.2 U2.56 | length 2391.7
  Top Layer w10: GPS1.3@14655.39,7390.43 14655.39,7286.61 v1(14678,7264) ; U2.56@15170.16,6239.53 v1@15170.16,6332.84
  Mid-Layer 2 w10: v1(14678,7264) 14694,7280 15444,7280 15607,7117 15607,6548 15517,6458 15473,6458 15325,6310 15193,6310 v1(15170,6333)
  Bottom Layer w10: v1(14678,7264) 14680,7266 R4.2@14680,7308.5
SCLK_FC: SWD2.2 U1.49 | length 1016.3
  Top Layer w10: SWD2.2@13695.39,7390.43 13695.39,7254.39 13695.39,7060.61 13793,6963 13982,6963 14167.64,6777.36 U1.49@14167.64,6680.47
SCLK_IMU: SWD1.2 U2.49 | length 2026.9
  Top Layer w10: v1(14074,7306) 14074,7389.04 SWD1.2@14075.39,7390.43 ; U2.49@15032.36,6239.53 15032.36,6159.64 v1(15033,6159)
  Bottom Layer w10: v1(14074,7306) 14074,7302 14101,7275 14101,6720 14312,6509 14475,6509 14517,6467 14848,6467 14943,6372 14943,6319 14974,6288 15021,6288 15033,6276 v1(15033,6159)
SDA_B: GPS1.2 R3.2 U2.55 | length 2878.5
  Top Layer w10: v1@14606.18,7263.18 GPS1.2@14606.18,7390.43 ; v1(15130,6034) 15169,6073 15169,6122 15150.47,6140.53 U2.55@15150.47,6239.53
  Mid-Layer 2 w10: v1(14606,7263) 14653,7310 15472,7310 15635,7147 15635,6478 15505,6348 15444,6348 v1(15130,6034)
  Bottom Layer w10: R3.2@14600,7308.5 14600,7269 v1(14606,7263)
SPI3_CK: IS1.2 MS1.8 NRF1.4 U1.34 U5.6 | length 2948.9
  Top Layer w10: U1.34@14240.47,6332.05 14291.95,6332.05 14313,6311 v1(14313,6243) ; IS1.2@14504.06,6255.31 14589.32,6255.31 14600.18,6266.18 v1(14670.79,6266.18)
  Mid-Layer 2 w10: v1(14341,7090) 14341,7036 14517,6860 14563,6814 14563,6512 14581,6494 14581,6311 14625.82,6266.18 v1(14670.79,6266.18) 14751.18,6266.18 14774,6289 14774,6668 v1(15096,6990)
  Bottom Layer w10: U5.6@14201.73,6905 14244,6905 14255,6916 14255,6967 14245,6977 14245,7064 14271,7090 v1(14341,7090) ; v1@14310.5,6245.5 14308,6243 v1(14313,6243) 14647.61,6243 v1(14670.79,6266.18) ; NRF1.4@15094,6990 v1(15096,6990)
SPI3_CK_IMU: LIS1.1 LSM1.2 U2.34 U3.6 | length 1185.6
  Top Layer w10: LSM1.2@14499.06,6620.31 14556.32,6620.31 14601,6665 v1(14628,6665) v1@14634,6665 ; U3.6@14653.27,7020 v1(14741,7020) ; v1(14756,6844) 14756,6843 14771,6828 14771,6737 14794,6714 14794,6669.53 ; LIS1.1@14769.53,6669.53 14794,6669.53 ; U2.34@14959.53,6587.95 14898.05,6587.95 14873,6613 14873,6643 14846.47,6669.53 14794,6669.53
  Mid-Layer 1 w10: v1(14628,6665) 14586,6707 14586,6781 14649,6844 v1(14756,6844)
  Bottom Layer w10: v1(14741,7020) 14743,7020 14756,7007 v1(14756,6844)
SPI3_SI: IS1.3 MS1.7 NRF1.5 U1.36 U5.5 | length 4832.2
  Top Layer w10: v1(13878,7086) v1(13878,7244) ; v1(14170,6332) 14170,6353.42 14188,6371.42 U1.36@14240.47,6371.42 ; IS1.3@14504.06,6275 14566,6275 14606.39,6315.39 v1(14670.79,6315.39)
  Mid-Layer 1 w10: v1(13789,6639) 13772,6656 13658,6656 13615,6699 13447,6699 13433,6713 13433,6789 13458,6814 13547,6814 13613,6880 13615,6880 13700,6965 13700,7031 13757,7088 13877,7088 13878,7087 v1(13878,7086)
  Mid-Layer 2 w10: v1(13878,7244) 14207,7244 v1(14233,7270) ; v1(14670.79,6315.39) 14688.39,6315.39 14701,6328 14701,6517 14689,6529 14689,6623 15039,6973 15039,7018 15091,7070 v1(15277,7070)
  Bottom Layer w10: v1(13789,6639) 13789,6641 13792,6638 13792,6318 13838,6272 14110,6272 v1(14170,6332) 14232,6270 14563,6270 14608.39,6315.39 v1(14670.79,6315.39) ; U5.5@14201.73,6955 14201.73,7242.73 14229,7270 v1(14233,7270) ; NRF1.5@15094,7040 15247,7040 v1(15277,7070)
SPI3_SI_IMU: LIS1.11 LSM1.3 U2.36 U3.5 | length 1316
  Top Layer w10: LSM1.3@14499.06,6640 14542,6640 14562,6660 14562,6692 14580,6710 v1(14629,6710) ; U3.5@14653.27,7070 v1@14781,7070 ; LIS1.11@14769.53,6630.16 v1@14819.16,6630.16 ; v1@14805,6858 14805,6748 v1(14909,6644) ; v1@14874,6535 14887.58,6548.58 U2.36@14959.53,6548.58
  Mid-Layer 1 w10: v1(14629,6710) 14687,6710 14755,6642 14819,6642 v1(14824,6637)
  Bottom Layer w10: v1(14789,7062) 14807,7044 v1(14807,6860) ; v1(14824,6637) v1@14902,6637 ; v1@14873,6535 14873,6635
  other v1: 14874,6534
SPI3_SO: IS1.4 MS1.6 NRF1.6 U1.35 U5.2 | length 3503.9
  Top Layer w10: U1.35@14240.47,6351.73 14242.2,6350 v1(14339,6350) ; IS1.4@14504.06,6294.69 14547.69,6294.69 14555.5,6302.5 14617.61,6364.61 v1(14670.79,6364.61)
  Mid-Layer 1 w10: v1(14035,7097) 14092.5,7039.5 14370.5,7039.5 ; 14366,7035 14370.5,7039.5 ; v1(14486,7155) 14370.5,7039.5
  Mid-Layer 2 w10: v1(13823,6792) 13838,6792 13948,6902 13948,7010 v1(14035,7097) ; v1(14486,7155) 14689,6952 14689,6859 ; v1(14670.79,6364.61) 14654,6381.39 14654,6632 14689,6667 14689,6859 ; v1@15275,7110 14940,7110 14689,6859
  Bottom Layer w10: v1@13830,6793 13892,6855 U5.2@13918.27,6855 ; v1(14339,6350) 14339,6348 14393,6294 14548,6294 14618.61,6364.61 v1(14670.79,6364.61) ; v1(14486,7155) v1@14487,7155 ; NRF1.6@15094,7090 15235,7090 15257,7112 v1(15277,7112)
SPI3_SO_IMU: LIS1.9 LSM1.4 U2.35 U3.2 | length 1173.2
  Top Layer w10: LSM1.4@14499.06,6659.69 14527.69,6659.69 14542,6674 14542,6722 14575,6755 v1(14635,6755) ; v1@14727.84,6571.16 14749.84,6571.16 ; v1(14737,6737) 14737,6815 14721,6831 14721,6913 14778,6970 U3.2@14936.73,6970 ; LIS1.9@14749.84,6610.47 14749.84,6571.16 ; U2.35@14959.53,6568.27 14851,6568.27 14837.73,6555 14766,6555 14749.84,6571.16
  Mid-Layer 1 w10: v1(14635,6755) 14719,6755 v1(14737,6737)
  Bottom Layer w10: v1(14727,6572) 14727,6727
SWD_FC: SWD2.3 U1.46 | length 1228
  Top Layer w10: v1(13745,7252) SWD2.3@13745,7390.43 ; v1(14109,6569) 14221.27,6569 14222,6568.27 U1.46@14240.47,6568.27
  Bottom Layer w10: v1(13745,7252) 13744,7251 13744,7220 13814,7150 13814,6995 13789,6970 13789,6714 13854.59,6648.41 13919.59,6648.41 13999,6569 v1(14109,6569)
SWD_IMU: SWD1.3 U2.46 | length 1880.7
  Top Layer w10: SWD1.3@14125,7390.43 14125,7309 v1(14127,7307) ; U2.46@14959.53,6351.73 15034.27,6351.73 15048,6338 15048,6330 v1(15045,6327)
  Bottom Layer w10: v1(14127,7307) 14127,6733 14290,6570 14464,6570 14539.17,6494.83 14864.17,6494.83 14968,6391 14968,6340 14981,6327 v1(15045,6327)
UART1_R_1: BLE1.2 U1.43 | length 1191.5
  Top Layer w10: U1.43@14240.47,6509.21 14359.79,6509.21 14387,6482 v1(14386,6481)
  Mid-Layer 1 w10: v1(14215,5556) 14215,5595 14430,5810 14430,6437 v1(14386,6481)
UART1_R_2: GPS1.5 U2.43 | length 1918.4
  Top Layer w10: GPS1.5@14754,7390.43 14754,7317 14785,7286 v1@14785,7246 ; U2.43@14959.53,6410.79 15044.21,6410.79 15067,6388 v1(15105,6388)
  Mid-Layer 2 w10: v1(14786,7246) 14818,7214 15369,7214 15459,7124 15459,6997 15121,6659 15121,6404 v1(15105,6388)
UART1_T_1: BLE1.1 U1.42 | length 1322.9
  Top Layer w10: U1.42@14240.47,6489.53 14320.47,6489.53 v1(14329,6481) ; v1(14262,5491) 14263.82,5492.82 BLE1.1@14263.82,5559.57
  Mid-Layer 1 w10: v1(14262,5491) 14260,5489 14208,5489 14181,5516 14181,5612 14304,5735 14304,5864 14253,5915 14253,6327 14329,6403 v1(14329,6481)
UART1_T_2: GPS1.4 U2.42 | length 1833.4
  Top Layer w10: GPS1.4@14705,7390.43 14705,7305 14740,7270 v1(14740,7228) ; U2.42@14959.53,6430.47 15076.47,6430.47 v1(15082,6436)
  Mid-Layer 2 w10: v1(14740,7228) 14739,7228 14769,7198 14796,7171 15352,7171 15409,7114 15409,7006 15082,6679 v1(15082,6436)
UART2_R_1: U1.17 U2.16 | length 3811
  Top Layer w10: v1(13848,6062) 13848,6161 13872.36,6185.36 U1.17@13872.36,6239.53 ; U2.16@15400.47,6607.64 15528.64,6607.64 v1(15547,6626)
  Mid-Layer 1 w10: v1(13848,6062) 13817,6062 13798,6043 13798,5710 13949,5559 14012,5559 14157,5414 15117,5414 15157,5454 15157,6011 15272,6126 15547,6126 15622,6201 15622,6591 15587,6626 v1(15547,6626)
UART2_R_2: U1.16 U2.17 | length 4617.3
  Top Layer w10: v1(13735,6270) 13735,6290 13757.36,6312.36 U1.16@13799.53,6312.36 ; U2.17@15327.64,6680.47 15327.64,6740.64 15375,6788 15375,6916 15545,7086 v1(15562,7086)
  Mid-Layer 1 w10: v1(13735,6270) 13594,6411 13418,6411 13396,6433 13396,7253 13505,7362 13854,7362 14047,7169 14390,7169 14705,7484 15502,7484 15562,7424 v1(15562,7086)
UART3_R_1: PI1.3 PI2.2 U1.30 | length 2362
  Top Layer w10: PI2.2@14075.39,7025.43 14075.39,6973.61 14085,6964 14257,6964 v1(14279.5,6986.5) ; U1.30@14128.27,6239.53 14128.27,5942.73 v1(14166,5905) ; v1@14283,6990 14303,7010 14303,7283 PI1.3@14360,7340
  Mid-Layer 1 w10: v1(14323,5905) 14351,5905 14388,5942 v1(14388,6179)
  Mid-Layer 2 w10: v1(14166,5905) v1(14323,5905) ; v1(14279.5,6986.5) 14429,6837 14429,6220 v1(14388,6179)
UART3_R_2: SONAR1.2 U2.30 | length 1008.9
  Top Layer w10: U2.30@15071.73,6680.47 15071.73,6908.73 15141,6978 15366,6978 15471,7083 v1@15471,7186 ; SONAR1.2@15475.39,7390.43 15477,7388.83 v1(15477,7388)
  Bottom Layer w10: v1(15472,7187) 15477,7192 v1(15477,7388)
UART3_T_1: D2.1 R41.2 U1.29 | length 2510.2
  Top Layer w10: U1.29@14108.58,6239.53 14108.58,5980 14108.58,5879.42 v1(14115.28,5872.72)
  Mid-Layer 1 w10: v1(14813,5909) v1(14813,6077)
  Mid-Layer 2 w10: v1(14115.28,5872.72) 14136,5852 14349,5852 14756,5852 v1(14813,5909) ; v1(14453,6874) 14453,6278 14529,6202 14688,6202 v1(14813,6077)
  Bottom Layer w10: v1(14453,6874) 14446,6881 D2.1@14446,6955 14459.5,6968.5 R41.2@14560,6968.5
UART3_T_2: SONAR1.1 U2.29 | length 1276.2
  Top Layer w10: U2.29@15091.42,6680.47 15091.42,6590.58 15139,6543 v1(15236,6543) ; SONAR1.1@15426.18,7390.43 15426.18,7388.82 v1(15427,7388)
  Mid-Layer 2 w10: v1(15236,6543) 15380,6543 15440,6603 v1(15440,6885)
  Bottom Layer w10: v1(15427,7388) 15427,6898 v1(15440,6885)
UART4_R_1: U1.52
UART4_R_2: IMU_BACK1.2 U2.52 | length 708
  Top Layer w10: v1(15001,6001) 15001,6069 15091.42,6159.42 U2.52@15091.42,6239.53
  Mid-Layer 1 w10: v1@15001,5569 v1(15001,6001)
  other v1: 14994,5560
UART4_T_1: U1.51
UART4_T_2: IMU_BACK1.1 U2.51 | length 910.9
  Top Layer w10: U2.51@15071.73,6239.53 15071.73,6301.73 v1(15088,6318)
  Mid-Layer 1 w10: v1(15043,5559) 15043,6033 14985,6091 14985,6176 15088,6279 v1(15088,6318)
UART5_R_2: FLOW1.2 U2.54 | length 1924.9
  Top Layer w10: U2.54@15130.79,6239.53 15130.79,6177.21 15130.79,6091.21 v1(15131,6091)
  Mid-Layer 1 w10: v1(15096,7395) 15096,7391 15095,7390 15095,7291 15132,7254 15163,7254 15194,7254 15361,7254 15409,7206 15409,6211 15380,6182 15222,6182 v1(15131,6091)
UART5_T_1: U1.53
UART5_T_2: FLOW1.1 U2.53 | length 1907.7
  Top Layer w10: v1(15045,7394) 15046.18,7392.82 FLOW1.1@15046.18,7390.43 ; v1(15083,6093) 15111.1,6121.1 15111.1,6144 U2.53@15111.1,6239.53
  Mid-Layer 1 w10: v1(15045,7394) 15045,7273 15099,7219 15286,7219 15325,7180 15325,7018 15325,6996 ; v1(15083,6093) 15083,6097 15208,6222 15345,6222 15368,6245 15368,6515 15325,6558 15325,6705 15325,6996 ; 15323,6994 15325,6996
UART6_R_2: R46.2 U2.38 | length 1827.5
  Top Layer w10: U2.38@14959.53,6509.21 15048.79,6509.21 15087,6471 15141,6471 15160,6452 v1(15160,6398) ; v1(15733,6510) 15820,6510 v1(15840,6490)
  Mid-Layer 1 w10: v1(15490,6933) 15733,6690 v1@15733,6522 ; v1(15733,6510) v1@15733,6522 ; v1@15733,6514 v1@15733,6522
  Mid-Layer 2 w10: v1(15160,6398) 15160,6552 15379,6771 15379,6877 15435,6933 v1(15490,6933)
  Bottom Layer w10: R46.2@15840,6291.5 v1(15840,6490)
UART6_T_2: R45.2 U2.37 | length 1395.5
  Top Layer w10: U2.37@14959.53,6528.9 15077.1,6528.9 15107,6499 v1(15216,6499)
  Mid-Layer 1 w10: v1(15561,6702) 15694,6569 v1(15694,6468)
  Mid-Layer 2 w10: v1(15216,6499) 15257,6458 15408,6458 15488,6538 15488,6629 v1(15561,6702) ; v1(15694,6468) 15737,6468 15794,6468 v1(15901,6361)
  Bottom Layer w10: R45.2@15900,6291.5 15901,6292.5 v1(15901,6361)
pads on no net: *U1.9 BLE1.GND CAN1.GND FLOW1.GND GPS1.GND IMU_BACK1.GND IS1.6 IS1.7 LIS1.7 LIS1.8 LSM1.6 LSM1.7 LSM1.14 NRF1.0 PI2.GND POWER1.5 POWER1.GND SONAR1.GND SW1. SWD1.GND SWD2.GND U1.2 U1.3 U1.4 U1.40 U1.45 U1.50 U2.2 U2.3 U2.4 U2.9 U2.10 U2.11 U2.14 U2.15 U2.20 U2.21 U2.22 U2.23 U2.24 U2.25 U2.26 U2.27 U2.39 U2.40 U2.41 U2.50 U2.57 U2.58 U2.59 U4.5 U8.1 U8.2 U8.4 U8.5 U8.6 U8.7 U8.8 U8.9 U8.14 U8.15 U8.16 U8.17

## Polygon pours and split planes (outlines as drawn)
5V_OUT on Top Layer "Keep-Out Layer-No Net" (hatched 90Degree grid 10 track 6, remove dead copper, pour order 1000): 13068,7620 13075,7613 13075,7432 13023,7432 12959,7368 12938,7347 12938,7219 12938,5595 12982,5551 12996,5537 13226,5537 13265,5537 13291,5511 13298,5504 13298,5382 13298,5351 13279,5332 13269,5322 12819,5322 12777,5322 12703,5396 12699,5400 12699,7515 12699,7523 12798,7622
GND on Top Layer "Keep-Out Layer-No Net" (hatched 90Degree grid 10 track 6, remove dead copper, pour order 1001): 13557,7602.5 13557,5734.5 13449,5626.5 13424,5601.5 13424,5345.5 13424,5342.5 13553,5213.5 15922,5213.5 16082,5373.5 16010,5445.5 16010,7628.5 15963,7675.5 13569,7675.5
GND on Bottom Layer "Keep-Out Layer-No Net" (hatched 90Degree grid 10 track 6, remove dead copper, pour order 1002): 13056.66,7314 13062.66,7308 13062.66,5637 13062.66,5615 13104.66,5573 13129.66,5548 13249.66,5548 13296.66,5548 13320.66,5572 13325.66,5577 13325.66,7277 13325.66,7580 13367.66,7622 15916.66,7622 15973.66,7565 15970.66,7562 15970.66,5445 15970.66,5406 15878.66,5314 12766.66,5314 12657.66,5423 12657.66,5440 12657.66,7571 12721.66,7635 12730.66,7626 13094.66,7626 13094.66,7393 13055.66,7354
GND on Bottom Layer "Keep-Out Layer-No Net" (hatched 90Degree grid 10 track 6, remove dead copper, pour order 1003): 13037,7640 13051,7626 13051,7400 13068,7383 13360,7383 13360,7677 13359,7678

## Keep-outs
Keep-Out Layer:
  lines w10: 12705,7495 cw(c12832.5,7497.5) 12830,7625 15835,7625 ; 12705,7505 12705,5450 ccw(c12832.5,5452.5) 12835,5325 15840,5325 ; 15820,7625 cw(c15822.5,7497.5) 15950,7500 15950,5435 ; 15825,5325 ccw(c15822.5,5452.5) 15950,5455

## Other copper
Top Layer:
  pour cut-out: 14675,6698 14675,6581 14703.55,6581.6 14806,6580 14806,6698
Bottom Layer:
  pour cut-out: 16551,6858 16551,6783 16566,6778 16631,6778 16631,6858
  pour cut-out: 14680,6706 14680,6589 14708.55,6589.6 14811,6588 14811,6706

## Silkscreen, mask and mechanical layers (free items; w line width, h text height)
Top Overlay:
  drawing of 1150 lines, arcs and shapes, not listed
  text "-" at 14424,7418 h40
  text "R" at 14428,7318 h40
  text "FC" at 13534,7281 h40
  text "IMU" at 13902,7278 h40
  text "S" at 12951.25,7238.61 h40 r90
  text "G" at 12774.99,7237.49 h40 r90
  text "+" at 12860.31,7237.35 h40 r90
  text "X<---" at 13702,7220.79 h40 r270
  text "T" at 14425,7221 h40
  text "Z" at 13645,7090 h40 r270
  text "Y<---" at 13537,7015.79 h40
  text "PWM:1~8" at 12748,6980 h40 r270
  text "AUX:1~4" at 12750,6425 h40 r270
  text "R" at 15932,6286 h40 r90
  text "T" at 15934,6239 h40 r90
  text "G" at 15932,6193 h40 r90
  text "GROUND" at 12725,6045 h40
  text "Final-Ver1.3" at 14308,5835 h40
  text "SBUS" at 12730,5660 h40
  text "DC" at 15205,5605 h40
  text "5V" at 15595,5605 h40
  text "+" at 13030,5360 h40
Bottom Overlay:
  pour cut-out: 14680,6706 14680,6589 14708.55,6589.6 14811,6588 14811,6706